# EAGLE board DashPCB (EAGLE 9.6.2), part 1 of 2
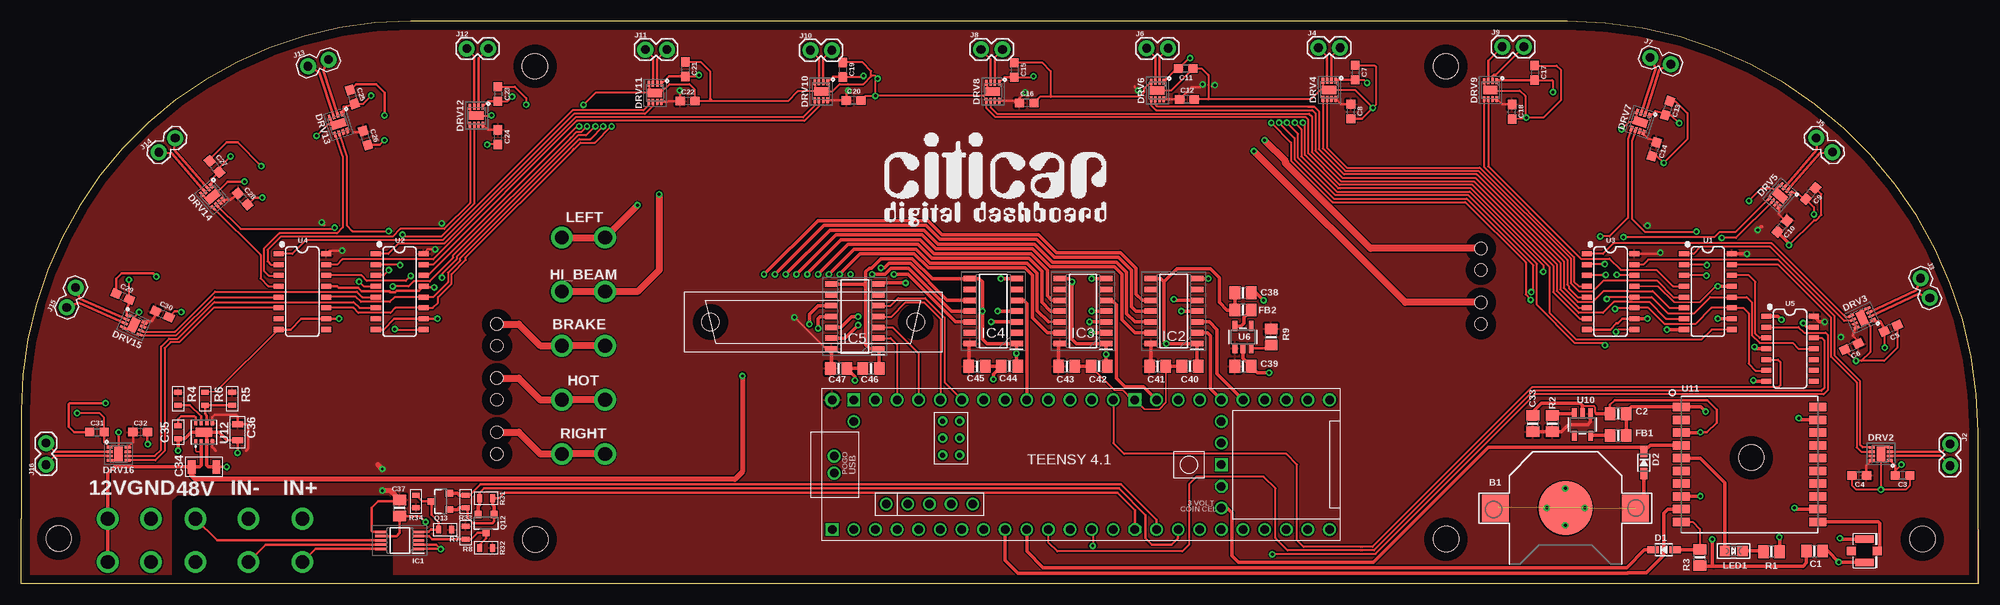
[diagram p0: board, top side]
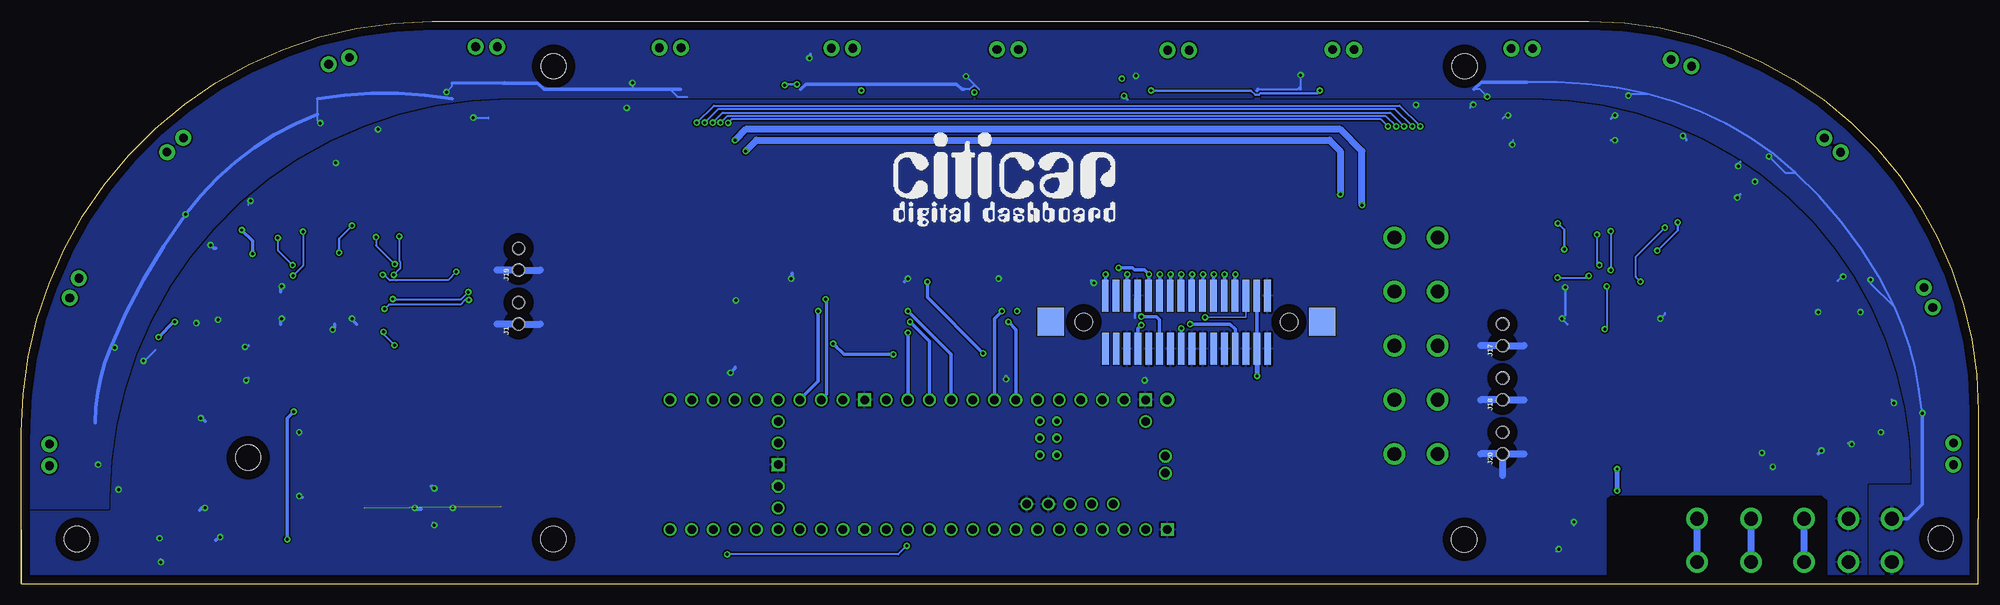
[diagram p1: board, bottom side, seen from below]

Size 229.87 x 66.04 mm. Coordinates in mm from the lower left corner, seen from the top.
Outline: 229.87,17.78 229.87,7.62 229.87,6.35 229.87,0
Outline: 229.87,17.78 arc90 181.61,66.04 45.72,66.04 arc90 0,20.32 0,7.62 0,0 1.27,0 229.87,0
Outline: 229.87,0 229.87,17.78
Outline: 229.87,0 229.87,17.78
Copper layers (1*16): Top 0.035mm / dielectric 1.5mm / Bottom 0.035mm
Design rules "default *": minimum track width 6mil, minimum drill 0.35mm, track to track 6mil, track to pad 6mil, pad to pad 6mil, via to via 6mil, smd to smd 6mil, copper to edge 40mil, drill to drill 6mil, minimum pad ring 10mil, minimum via ring 8mil, stop-mask expansion 3mil, vias tented up to drill 14mil, thermal gap 10mil
Holes 3 mm at 167.34,60.76 60.35,60.76 4.39,5.31 60.38,5.21 167.36,5.23 223.32,5.23
tRestrict: area 17.9,0 to 43.4,10.2
bRestrict: area 17.9,0 to 43.4,10.2

## Footprints (pad centres in the part's own frame; a part is rotated, then mirrored left to right if it is on the bottom)
TE_TAB = drill 1.6 pad 2.54: P$1 -2.54,0; P$2 2.54,0
CR1220 = smd 3.2 x 3.2: +$1 -8.225,0; +$2 8.225,0 | smd 6.35 x 6.35: - 0,0
0805-NO = smd 1.24 x 1.5: 1 -0.95,0; 2 0.95,0
0603 = smd 1.1 x 1: 1 -0.85,0; 2 0.85,0
C1206 = smd 0.9 x 1.6: P$1 -1.45,0; P$2 1.45,0
C0603 = smd 0.6 x 0.9: P$1 -0.75,0; P$2 0.75,0
C0805 = smd 0.7 x 1.3: P$1 -0.95,0; P$2 0.95,0
SOD-323 = smd 1.35 x 0.8: A 1.27,0; C -1.27,0
SON50P200X200X80-9N = smd 0.7 x 0.3: 1 -1.05,0.75; 2 -1.05,0.25; 3 -1.05,-0.25; 4 -1.05,-0.75; 5 1.05,-0.75; 6 1.05,-0.25; 7 1.05,0.25; 8 1.05,0.75 | smd 1 x 1.7: 9 0,0
SOP50P490X110-10N = smd 1.4 x 0.3: 1 -2.2,1; 2 -2.2,0.5; 3 -2.2,0; 4 -2.2,-0.5; 5 -2.2,-1; 6 2.2,-1; 7 2.2,-0.5; 8 2.2,0; 9 2.2,0.5; 10 2.2,1
SOIC127P600X175-14N = smd 1.525 x 0.65: 1 -2.712,3.81; 2 -2.712,2.54; 3 -2.712,1.27; 4 -2.712,0; 5 -2.712,-1.27; 6 -2.712,-2.54; 7 -2.712,-3.81; 8 2.712,-3.81; 9 2.712,-2.54; 10 2.712,-1.27; 11 2.712,0; 12 2.712,1.27; 13 2.712,2.54; 14 2.712,3.81
1X02_PP_HOLES_ONLY = drill 0.889 pad 0.813: 1 0,0; 2 2.54,0 | hole 1.473: 0,0; 2.54,0
1X02 = drill 1.016 pad 1.88: 1 0,0; 2 2.54,0
CHIPLED_0805 = smd 1.2 x 1.2: A 0,-1.05; C 0,1.05
SOT23-3 = smd 0.8 x 0.9: 1 -0.95,-1; 2 0.95,-1; 3 0,1.1
R0603 = smd 0.6 x 0.9: P$1 -0.75,0; P$2 0.75,0
SO16 = smd 0.6 x 1.2: 1 -4.445,-2.8; 2 -3.175,-2.8; 3 -1.905,-2.8; 4 -0.635,-2.8; 5 0.635,-2.8; 6 1.905,-2.8; 7 3.175,-2.8; 8 4.445,-2.8; 9 4.445,2.8; 10 3.175,2.8; 11 1.905,2.8; 12 0.635,2.8; 13 -0.635,2.8; 14 -1.905,2.8; 15 -3.175,2.8; 16 -4.445,2.8
SO14 = smd 0.6 x 1.2: 1 -3.175,-2.8; 2 -1.905,-2.8; 3 -0.635,-2.8; 4 0.635,-2.8; 5 1.905,-2.8; 6 3.175,-2.8; 7 4.445,-2.8; 8 4.445,2.8; 9 3.175,2.8; 10 1.905,2.8; 11 0.635,2.8; 12 -0.635,2.8; 13 -1.905,2.8; 14 -3.175,2.8
SOT23-5 = smd 0.55 x 1.2: 1 -0.95,-1.3; 2 0,-1.3; 3 0.95,-1.3; 4 0.95,1.3; 5 -0.95,1.3
FGPMMOPA6H = smd 2 x 1: P$1 -8,6.75; P$2 -8,5.25; P$3 -8,3.75; P$4 -8,2.25; P$5 -8,0.75; P$6 -8,-0.75; P$7 -8,-2.25; P$8 -8,-3.75; P$9 -8,-5.25; P$10 -8,-6.75; P$11 8,-6.75; P$12 8,-5.25; P$13 8,-3.75; P$14 8,-2.25; P$15 8,-0.75; P$16 8,0.75; P$17 8,2.25; P$18 8,3.75; P$19 8,5.25; P$20 8,6.75 | hole 3: 0.2,0.8
SIL0008D = smd 0.5 x 0.4: 1 -1.05,0.975; 2 -1.05,0.325; 3 -1.05,-0.325; 4 -1.05,-0.975; 5 1.05,-0.975; 6 1.05,-0.325; 7 1.05,0.325; 8 1.05,0.975 | smd 1.1 x 1.9: 9 0,0
U$3_ADAPTER = smd 0.8 x 3.75: 1 10.795,3.095; 2 10.82,-3.155; 3 9.525,3.095; 4 9.55,-3.155; 5 8.255,3.095; 6 8.28,-3.155; 7 6.985,3.095; 8 7.01,-3.155; 9 5.715,3.095; 10 5.74,-3.155; 11 4.445,3.095; 12 4.47,-3.155; 13 3.175,3.095; 14 3.2,-3.155; 15 1.905,3.095; 16 1.93,-3.155; 17 0.635,3.095; 18 0.66,-3.155; 19 -0.635,3.095; 20 -0.61,-3.155; 21 -1.905,3.095; 22 -1.88,-3.155; 23 -3.175,3.095; 24 -3.15,-3.155; 25 -4.445,3.095; 26 -4.42,-3.155; 27 -5.715,3.095; 28 -5.69,-3.155; 29 -6.985,3.095; 30 -6.96,-3.155; 31 -8.255,3.095; 32 -8.23,-3.155 | smd 3.1 x 3.3: P$33 -14.665,0; P$34 17.205,0 | hole 2.1: -10.795,0; 13.335,0; -10.795,0; 13.335,0
TEENSY41 = drill 1: 0-RX1/CS1/CRX2 -27.94,-7.62; 1-TX1/MISO1/CTX2 -25.4,-7.62; 2-OUT2 -22.86,-7.62; 3-LRCLK2 -20.32,-7.62; 4-BCLK2 -17.78,-7.62; 5-IN2 -15.24,-7.62; 6-OUT1D -12.7,-7.62; 7-RX2/OUT1A -10.16,-7.62; 8-TX2/IN2 -7.62,-7.62; 9-OUT1C -5.08,-7.62; 10-CS\MQSR -2.54,-7.62; 11-MOSI/CTX1 0,-7.62; 12-MISO/MQSL 2.54,-7.62; 13-SCK/LED 2.54,7.62; 14-A0/TX3/SPDIF_OUT 0,7.62; 15-A1/RX3/SPDIF_IN -2.54,7.62; 16-A2/RX4/SCL1 -5.08,7.62; 17-A3/TX4/SDA1 -7.62,7.62; 18-A4/SDA0 -10.16,7.62; 19-A5/SCL0 -12.7,7.62; 20-A6/TX5/LRCLK1 -15.24,7.62; 21-A7/RX5/BCLK1 -17.78,7.62; 22-A8/CTX1 -20.32,7.62; 23-A9/CRX1/MCLK1 -22.86,7.62; 24-A10/TX6/SCL2 7.62,-7.62; 25-A11/RX6/SDA2 10.16,-7.62; 26-A12/MOSI1 12.7,-7.62; 27-A13/SCK1 15.24,-7.62; 28-RX7 17.78,-7.62; 29-TX7 20.32,-7.62; 30-CRX3 22.86,-7.62; 31-CTX3 25.4,-7.62; 32-OUT1B 27.94,-7.62; 33-MCLK2 27.94,7.62; 34-RX8 25.4,7.62; 35-TX8 22.86,7.62; 36-PWM 20.32,7.62; 37-PWM 17.78,7.62; 38-A14/CS/IN1 15.24,7.62; 39-A15/CS/OUT1A 12.7,7.62; 40-A16/CS1 10.16,7.62; 41-A17/MISO1 7.62,7.62; +5V -24.13,-4.62; D+ -30.25,-1; D- -30.25,1; DM -21.59,-4.62; DP -19.05,-4.62; GND4 -16.51,-4.62; GND5 -13.97,-4.62; ON/OFF 15.24,5.08; PROGRAM 15.24,2.54; VBAT 15.24,-5.08; VUSB -27.94,5.08 | drill 1 octagon: 3V3-1 5.08,-7.62; 3V3-2 15.24,-2.54; 3V3-3 -25.4,7.62 | drill 0.6: G -15.51,3.12; LED -17.51,3.12; R+ -17.51,5.12; R- -15.51,5.12; T+ -15.51,1.12; T- -17.51,1.12 | drill 1 square: GND1 -30.48,-7.62; GND2 15.24,0; GND3 5.08,7.62; GND6 -27.94,7.62 | drill 1 pad 1.676: VIN -30.48,7.62
U.FL = smd 2.2 x 0.85: P$1 0,1.375; P$2 0,-1.375 | smd 1.05 x 1: P$3 1.525,0; P$4 -1.525,0

## Placement (x,y rotation side)
12V  SPADECONN  [TE_TAB]  10.16,5.08 270 top
48V  SPADECONN  [TE_TAB]  20.45,5.08 90 top
B1  CR1220  [CR1220]  181.38,8.86 180 top
BRAKE  SPADECONN  [TE_TAB]  66.04,27.94 180 top
C1  0.1uF  [0805-NO]  210.64,3.84 0 top
C2  10uF  [0805-NO]  187.58,19.94 180 top
C3  0.1uF  [0603]  220.98,12.7 180 top
C4  0.1uF  [0603]  215.9,12.7 0 top
C5  0.1uF  [0603]  219.59,29.98 205 top
C6  0.1uF  [0603]  214.99,27.84 25 top
C7  0.1uF  [0603]  156.69,60.02 270 top
C8  0.1uF  [0603]  156.18,55.45 90 top
C9  0.1uF  [0603]  210.18,45.81 229 top
C10  0.1uF  [0603]  206.85,41.97 49 top
C11  0.1uF  [0603]  136.78,60.48 180 top
C12  0.1uF  [0603]  136.91,56.87 180 top
C13  0.1uF  [0603]  193.39,55.84 252 top
C14  0.1uF  [0603]  191.82,51.01 72 top
C15  0.1uF  [0603]  116.66,60.32 270 top
C16  0.1uF  [0603]  118.11,56.46 180 top
C17  0.1uF  [0603]  177.77,59.99 270 top
C18  0.1uF  [0603]  175.11,55.42 90 top
C19  0.1uF  [0603]  96.49,60.35 270 top
C20  0.1uF  [0603]  97.76,56.74 180 top
C21  0.1uF  [0603]  78,60.43 270 top
C22  0.1uF  [0603]  78.26,56.67 180 top
C23  0.1uF  [0603]  56.01,57.51 270 top
C24  0.1uF  [0603]  56.01,52.43 90 top
C25  0.1uF  [0603]  38.88,57.16 288 top
C26  0.1uF  [0603]  40.45,52.33 108 top
C27  0.1uF  [0603]  22.69,49 311 top
C28  0.1uF  [0603]  26.02,45.17 131 top
C29  0.1uF  [0603]  11.93,33.72 336 top
C30  0.1uF  [0603]  16.57,31.66 156 top
C31  0.1uF  [0603]  8.89,17.78 0 top
C32  0.1uF  [0603]  13.97,17.78 180 top
C33  10uF  [0805-NO]  177.55,18.8 90 top
C34  10uF / C3216X7R1E106M160AE  [C1206]  21.46,13.72 0 top
C35  3300pF / GRM1885C1H332JA01D  [C0603]  18.41,17.78 270 top
C36  22uF / C2012X7S1A226M125AC  [C0805]  25.4,17.78 270 top
C37  10uF  [0805-NO]  44.45,8.89 90 top
C38  10uF  [0805-NO]  143.51,34.16 0 top
C39  10uF  [0805-NO]  143.51,25.53 0 top
C40  10uF  [0805-NO]  137.29,25.53 180 top
C41  10uF  [0805-NO]  133.48,25.53 0 top
C42  10uF  [0805-NO]  126.62,25.53 180 top
C43  10uF  [0805-NO]  122.81,25.53 0 top
C44  10uF  [0805-NO]  116.08,25.53 180 top
C45  10uF  [0805-NO]  112.27,25.53 0 top
C46  10uF  [0805-NO]  99.82,25.27 180 top
C47  10uF  [0805-NO]  96.01,25.27 0 top
D1  1N4148  [SOD-323]  192.96,3.96 0 top
D2  CUS520  [SOD-323]  190.6,14.22 270 top
DRV2  DRV8837CDSGR  [SON50P200X200X80-9N]  218.44,15.24 180 top
DRV3  DRV8837CDSGR  [SON50P200X200X80-9N]  216.22,31.21 205 top
DRV4  DRV8837CDSGR  [SON50P200X200X80-9N]  153.64,57.99 270 top
DRV5  DRV8837CDSGR  [SON50P200X200X80-9N]  206.6,45.56 229 top
DRV6  DRV8837CDSGR  [SON50P200X200X80-9N]  133.45,57.91 270 top
DRV7  DRV8837CDSGR  [SON50P200X200X80-9N]  190.19,54.21 252 top
DRV8  DRV8837CDSGR  [SON50P200X200X80-9N]  114.12,57.78 270 top
DRV9  DRV8837CDSGR  [SON50P200X200X80-9N]  172.57,57.96 270 top
DRV10  DRV8837CDSGR  [SON50P200X200X80-9N]  93.95,57.81 270 top
DRV11  DRV8837CDSGR  [SON50P200X200X80-9N]  74.45,57.63 270 top
DRV12  DRV8837CDSGR  [SON50P200X200X80-9N]  53.47,54.97 270 top
DRV13  DRV8837CDSGR  [SON50P200X200X80-9N]  37.25,53.96 288 top
DRV14  DRV8837CDSGR  [SON50P200X200X80-9N]  22.44,45.42 311 top
DRV15  DRV8837CDSGR  [SON50P200X200X80-9N]  13.22,30.37 336 top
DRV16  DRV8837CDSGR  [SON50P200X200X80-9N]  11.43,15.24 0 top
FB1  Ferrite  [0805-NO]  187.58,17.4 0 top
FB2  Ferrite  [0805-NO]  143.51,32.13 180 top
GND  SPADECONN  [TE_TAB]  15.24,5.08 270 top
HI_BEAM  SPADECONN  [TE_TAB]  66.04,34.29 180 top
HOT  SPADECONN  [TE_TAB]  66.04,21.59 180 top
IC1  INA238AQDGSRQ1  [SOP50P490X110-10N]  44.45,5.08 180 top
IC2  TXB0104D  [SOIC127P600X175-14N]  135.38,32 180 top
IC3  TXB0104D  [SOIC127P600X175-14N]  124.71,32 180 top
IC4  TXB0104D  [SOIC127P600X175-14N]  114.17,32 180 top
IC5  TXB0104D  [SOIC127P600X175-14N]  97.92,31.37 180 top
IN+  SPADECONN  [TE_TAB]  33.02,5.08 270 top
IN-  SPADECONN  [TE_TAB]  26.67,5.08 270 top
J1  [1X02_PP_HOLES_ONLY]  171.45,30.48 90 bottom
J2  [1X02]  226.57,16.38 270 top
J3  [1X02]  223.1,35.87 295 top
J4  [1X02]  152.37,62.94 0 top
J5  [1X02]  210.83,52.34 319 top
J6  [1X02]  132.18,62.86 0 top
J7  [1X02]  191.35,61.79 342 top
J8  [1X02]  112.73,62.74 0 top
J9  [1X02]  173.96,63.04 0 top
J10  [1X02]  92.68,62.64 0 top
J11  [1X02]  73.3,62.71 0 top
J12  [1X02]  52.32,62.84 0 top
J13  [1X02]  33.67,60.75 18 top
J14  [1X02]  16.16,50.66 41 top
J15  [1X02]  5.34,32.44 66 top
J16  [1X02]  2.92,13.97 90 top
J17  [1X02_PP_HOLES_ONLY]  55.88,27.94 90 bottom
J18  [1X02_PP_HOLES_ONLY]  55.88,21.59 90 bottom
J19  [1X02_PP_HOLES_ONLY]  171.45,36.83 90 bottom
J20  [1X02_PP_HOLES_ONLY]  55.88,15.24 90 bottom
LED1  RED  [CHIPLED_0805]  201.14,3.84 270 top
LEFT  SPADECONN  [TE_TAB]  66.04,40.64 180 top
Q12  220mA/50V/3.5Ω  [SOT23-3]  54.61,7.11 180 top
Q13  220mA/50V/3.5Ω  [SOT23-3]  49.28,9.65 90 top
R1  1K  [0805-NO]  205.59,3.76 180 top
R2  10K  [0805-NO]  179.83,18.8 270 top
R3  10K  [0805-NO]  197.18,3.07 90 top
R4  100k  [R0603]  18.41,21.72 90 top
R5  525k  [R0603]  24.77,21.72 270 top
R6  100k  [R0603]  21.59,21.72 90 top
R7  10k  [R0603]  49.78,6.35 180 top
R8  10k  [R0603]  52.2,5.97 270 top
R9  10K  [0805-NO]  146.81,28.96 90 top
R31  10k  [R0603]  54.61,10.03 180 top
R32  10k  [R0603]  54.61,4.19 180 top
R33  10k  [R0603]  52.2,9.65 90 top
R34  10k  [R0603]  46.36,9.65 90 top
RIGHT  SPADECONN  [TE_TAB]  66.04,15.24 180 top
U1  SN74HC595D  [SO16]  198.12,34.29 270 top
U2  SN74HC595D  [SO16]  44.45,34.29 270 top
U3  SN74HC595D  [SO16]  186.69,34.29 270 top
U4  SN74HC595D  [SO16]  33.02,34.29 270 top
U5  MC74AC125DG  [SO14]  207.77,28.22 270 top
U6  MIC5225-3.3  [SOT23-5]  143.51,28.96 0 top
U10  [SOT23-5]  183.39,18.67 180 top
U11  FGPMMOPA6H  [FGPMMOPA6H]  203.02,14 0 top
U12  TPS82130SILR  [SIL0008D]  21.46,17.78 90 top
U$2  SUN370-2311-02  [U$3_ADAPTER]  94.28,30.73 0 bottom
U$3  TEENSY41  [TEENSY41]  125.73,13.97 0 top
U$20  U.FL  [U.FL]  216.51,3.86 0 top

## Library data of the parts
12V 48V BRAKE GND HI_BEAM HOT IN+ IN- LEFT RIGHT = Terminals
B1 C1 C2 C33 C37-C47 D1 D2 FB1 FB2 LED1 R1-R3 R9 U6 U10 U11 U$20 = microbuilder
C3-C32 = SparkFun-Capacitors; PROD_ID: CAP-00810
C34-C36 R4-R8 R31-R34 = MF_Passives; POPULATE: 1
DRV2-DRV16 = SamacSys_Parts; DESCRIPTION: 1A Low-Voltage H-Bridge Driver; HEIGHT: 0.8mm; MANUFACTURER_NAME: Texas Instruments; MANUFACTURER_PART_NUMBER: DRV8837CDSGR; MOUSER_PART_NUMBER: 595-DRV8837CDSGR; MOUSER_PRICE-STOCK: https://www.mouser.co.uk/ProductDetail/Texas-Instruments/DRV8837CDSGR?qs=vcbl%252BK4rRlftuEtjGJGzZQ%3D%3D
IC1 = SamacSys_Parts; DESCRIPTION: Current & Power Monitors & Regulators AEC-Q100, 85-V, 16-bit, high-precision, I C output current/voltage/charge monitor; HEIGHT: 1.1mm; MANUFACTURER_NAME: Texas Instruments; MANUFACTURER_PART_NUMBER: INA238AQDGSRQ1; MOUSER_PART_NUMBER: 595-INA238AQDGSRQ1; MOUSER_PRICE-STOCK: https://www.mouser.co.uk/ProductDetail/Texas-Instruments/INA238AQDGSRQ1?qs=QNEnbhJQKvZaH3%2FajejFPA%3D%3D
IC2-IC5 = SamacSys_Parts; DESCRIPTION: 4-BIT BIDIRECTIONAL VOLTAGE-LEVEL TRANSLATOR WITH AUTOMATIC DIRECTION SENSING AND +/-15-kV ESD PROTECTION; HEIGHT: 1.75mm; MANUFACTURER_NAME: Texas Instruments; MANUFACTURER_PART_NUMBER: TXB0104D; MOUSER_PART_NUMBER: 595-TXB0104D; MOUSER_PRICE-STOCK: https://www.mouser.co.uk/ProductDetail/Texas-Instruments/TXB0104D?qs=oFXvjAmG9Eh0u9dpGkn5zg%3D%3D
J1-J20 = SparkFun-Connectors
Q12 Q13 = SparkFun-DiscreteSemi; PROD_ID: TRANS-00830
U1-U4 = SparkFun-IC-Logic; PROD_ID: IC-07875
U5 = SparkFun-IC-Logic; PROD_ID: IC-08880
U12 = SamacSys_Parts; DESCRIPTION: 3-A 17V Step-down Converter Module with Integrated Inductor; HEIGHT: mm; MANUFACTURER_NAME: Texas Instruments; MANUFACTURER_PART_NUMBER: TPS82130SILR; MOUSER_PART_NUMBER: 595-TPS82130SILR; MOUSER_PRICE-STOCK: https://www.mouser.co.uk/ProductDetail/Texas-Instruments/TPS82130SILR?qs=diC8vqfyxkoyC4Q%252BBNy%2FPA%3D%3D
U$2 = my_conn
U$3 = teensy

## Nets
1PPS: U11.P$13
3.3V: C1.1 C2.1 FB1.2 R3.1 U11.P$1
+5V: C4.2 C6.2 C8.2 C10.2 C12.2 C14.2 C16.2 C18.2 C20.2 C22.2 C24.2 C26.2 C28.2 C30.2 C32.2 C33.1 C36.P$1 C37.2 C39.1 C41.1 C43.1 C45.1 C47.1 DRV2.7 DRV2.8 DRV3.7 DRV3.8 DRV4.7 DRV4.8 DRV5.7 DRV5.8 DRV6.7 DRV6.8 DRV7.7 DRV7.8 DRV8.7 DRV8.8 DRV9.7 DRV9.8 DRV10.7 DRV10.8 DRV11.7 DRV11.8 DRV12.7 DRV12.8 DRV13.7 DRV13.8 DRV14.7 DRV14.8 DRV15.7 DRV15.8 DRV16.7 DRV16.8 IC1.6 IC2.14 IC3.14 IC4.14 IC5.14 R2.2 R4.P$2 R5.P$1 R7.P$1 R8.P$1 R9.2 R32.P$1 R34.P$1 U1.16 U2.16 U3.16 U4.16 U5.14 U6.1 U10.1 U12.4 U12.5 U$2.5 U$3.VIN
+12V: 12V.P$1 12V.P$2 C3.2 C5.2 C7.2 C9.2 C11.2 C13.2 C15.2 C17.2 C19.2 C21.2 C23.2 C25.2 C27.2 C29.2 C31.2 C34.P$1 DRV2.1 DRV3.1 DRV4.1 DRV5.1 DRV6.1 DRV7.1 DRV8.1 DRV9.1 DRV10.1 DRV11.1 DRV12.1 DRV13.1 DRV14.1 DRV15.1 DRV16.1 U12.1 U12.2 U$2.3 U$2.4
BRAKE: BRAKE.P$1 BRAKE.P$2 J17.2
BUF_A0: IC5.2 U$3.23-A9/CRX1/MCLK1
BUF_A1: IC4.4 U$3.18-A4/SDA0
BUF_D0: IC2.5 U$3.40-A16/CS1
BUF_D1: IC2.4 U$3.39-A15/CS/OUT1A
BUF_D2: IC2.3 U$3.37-PWM
BUF_D3: IC2.2 U$3.38-A14/CS/IN1
BUF_D4: IC3.5 U$3.41-A17/MISO1
BUF_D5: IC3.4 U$3.16-A2/RX4/SCL1
BUF_D6: IC3.3 U$3.15-A1/RX3/SPDIF_IN
BUF_D7: IC3.2 U$3.14-A0/TX3/SPDIF_OUT
BUF_INT: IC5.5 U$3.20-A6/TX5/LRCLK1
BUF_LED3: IC4.3 U$3.19-A5/SCL0
BUF_RD: IC5.4 U$3.21-A7/RX5/BCLK1
BUF_RST: IC4.5 U$3.17-A3/TX4/SDA1
BUF_WR: IC5.3 U$3.22-A8/CTX1
ENABLE: R2.1 U10.3
FIX: LED1.A U11.P$5
FLIP_RCLK: U1.12 U2.12 U3.12 U4.12 U5.11
FLIP_SER: U1.14 U5.3
FLIP_SRCLK: U1.11 U2.11 U3.11 U4.11 U5.6
GND: B1.- C1.2 C2.2 C3.1 C4.1 C5.1 C6.1 C7.1 C8.1 C9.1 C10.1 C11.1 C12.1 C13.1 C14.1 C15.1 C16.1 C17.1 C18.1 C19.1 C20.1 C21.1 C22.1 C23.1 C24.1 C25.1 C26.1 C27.1 C28.1 C29.1 C30.1 C31.1 C32.1 C33.2 C34.P$2 C35.P$2 C36.P$2 C37.1 C38.2 C39.2 C40.2 C41.2 C42.2 C43.2 C44.2 C45.2 C46.2 C47.2 DRV2.4 DRV2.9 DRV3.4 DRV3.9 DRV4.4 DRV4.9 DRV5.4 DRV5.9 DRV6.4 DRV6.9 DRV7.4 DRV7.9 DRV8.4 DRV8.9 DRV9.4 DRV9.9 DRV10.4 DRV10.9 DRV11.4 DRV11.9 DRV12.4 DRV12.9 DRV13.4 DRV13.9 DRV14.4 DRV14.9 DRV15.4 DRV15.9 DRV16.4 DRV16.9 GND.P$1 GND.P$2 IC1.1 IC1.2 IC1.7 IC2.7 IC3.7 IC4.7 IC5.7 J1.1 J17.1 J18.1 J19.1 J20.1 R1.1 R6.P$2 U1.8 U1.10 U1.13 U2.8 U2.10 U2.13 U3.8 U3.10 U3.13 U4.8 U4.10 U4.13 U5.1 U5.4 U5.7 U5.13 U6.2 U10.2 U11.P$3 U11.P$8 U11.P$12 U11.P$19 U12.3 U12.9 U$2.1 U$2.2 U$2.6 U$2.10 U$2.14 U$2.16 U$2.20 U$2.24 U$2.25 U$2.28 U$3.GND1 U$3.GND2 U$3.GND3 U$3.GND4 U$3.GND5 U$3.GND6 U$20.P$1 U$20.P$2
GPS_RX: D1.C U$3.8-TX2/IN2
GPS_TX: U11.P$9 U$3.7-RX2/OUT1A
HI_BEAM: HI_BEAM.P$1 HI_BEAM.P$2 J1.2
HOT: HOT.P$1 HOT.P$2 J18.2
IN+: IC1.10 IN+.P$1 IN+.P$2
IN-: IC1.9 IN-.P$1 IN-.P$2
LCD_A0: IC5.13 U$2.26
LCD_A1: IC4.11 U$2.27
LCD_D0: IC2.10 U$2.7
LCD_D1: IC2.11 U$2.9
LCD_D2: IC2.12 U$2.11
LCD_D3: IC2.13 U$2.13
LCD_D4: IC3.10 U$2.15
LCD_D5: IC3.11 U$2.17
LCD_D6: IC3.12 U$2.19
LCD_D7: IC3.13 U$2.21
LCD_INT: IC5.10 U$2.8
LCD_LED1: U$2.30
LCD_LED2: U$2.32
LCD_LED3: IC4.12 U$2.31
LCD_RD: IC5.11 U$2.18
LCD_RST: IC4.10 U$2.23
LCD_WR: IC5.12 U$2.22
LEFT: J19.2 LEFT.P$1 LEFT.P$2
N$1: U1.9 U2.14
N$2: U2.9 U3.14
N$3: DRV2.2 J2.2
N$4: DRV2.3 J2.1
N$5: DRV3.2 J3.2
N$6: DRV3.3 J3.1
N$7: DRV4.2 J4.2
N$8: DRV4.3 J4.1
N$9: DRV5.2 J5.2
N$10: DRV5.3 J5.1
N$11: DRV6.2 J6.2
N$12: DRV6.3 J6.1
N$13: DRV7.2 J7.2
N$14: DRV7.3 J7.1
N$15: DRV8.2 J8.2
N$16: DRV8.3 J8.1
N$17: DRV9.2 J9.2
N$18: DRV9.3 J9.1
N$19: DRV10.2 J10.2
N$20: DRV10.3 J10.1
N$21: DRV11.2 J11.2
N$22: DRV11.3 J11.1
N$23: DRV12.2 J12.2
N$24: DRV12.3 J12.1
N$25: DRV13.2 J13.2
N$26: DRV13.3 J13.1
N$27: DRV14.2 J14.2
N$28: DRV14.3 J14.1
N$29: DRV15.2 J15.2
N$30: DRV15.3 J15.1
N$31: DRV16.2 J16.2
N$32: DRV16.3 J16.1
N$33: U3.9 U4.14
N$34: DRV2.6 U1.15
N$35: DRV3.6 U1.1
N$36: DRV5.6 U1.2
N$37: DRV7.6 U1.3
N$38: DRV9.6 U1.4
N$39: DRV4.6 U1.5
N$40: DRV6.6 U1.6
N$41: DRV8.6 U1.7
N$42: DRV10.6 U2.15
N$43: DRV11.6 U2.1
N$44: DRV12.6 U2.2
N$45: DRV13.6 U2.3
N$46: DRV14.6 U2.4
N$47: DRV15.6 U2.5
N$48: DRV16.6 U2.6
N$49: DRV2.5 U3.15
N$50: DRV3.5 U3.1
N$51: DRV5.5 U3.2
N$52: DRV7.5 U3.3
N$53: DRV9.5 U3.4
N$54: DRV4.5 U3.5
N$55: DRV6.5 U3.6
N$56: DRV8.5 U3.7
N$57: DRV10.5 U4.15
N$58: DRV11.5 U4.1
N$59: DRV12.5 U4.2
N$60: DRV13.5 U4.3
N$61: DRV14.5 U4.4
N$62: DRV15.5 U4.5
N$63: DRV16.5 U4.6
N$64: FB1.1 U10.5
N$65: C35.P$1 U12.8
N$66: LED1.C R1.2
N$67: U11.P$11 U$20.P$3
N$68: B1.+$1 B1.+$2 D2.A
N$69: R4.P$1 U12.7
N$70: R9.1 U6.3
N$71: R5.P$2 R6.P$1 U12.6
OUT: FB2.1 U6.5
P$1: C38.1 C40.1 C42.1 C44.1 C46.1 FB2.2 IC2.1 IC2.8 IC3.1 IC3.8 IC4.1 IC4.8 IC5.1 IC5.8
RIGHT: J20.2 RIGHT.P$1 RIGHT.P$2
RX_3V: D1.A R3.2 U11.P$10
SCL: IC1.5 Q13.3 R7.P$2 R34.P$2
SCL2: Q13.2 R33.P$2 U$3.24-A10/TX6/SCL2
SDA: IC1.4 Q12.3 R8.P$2 R32.P$2
SDA2: Q12.2 R31.P$2 U$3.25-A11/RX6/SDA2
SPI_MOSI: U5.2 U$3.11-MOSI/CTX1
SPI_RCLK: U5.12 U$3.9-OUT1C
SPI_SCK: U5.5 U$3.13-SCK/LED
TEENSY_3V3: Q12.1 Q13.1 R31.P$1 R33.P$1 U$3.3V3-1
V_BUS: 48V.P$1 48V.P$2 IC1.8
VBACKUP: D2.C U11.P$4 U$3.VBAT